# Altium PCB 气象传感器.PcbDoc (part 2 of 2)
Units mm, origin at the board's own origin, x right, y up, seen from the top; angles counter-clockwise.
Board outline 72.46 x 63.14 mm, 2 copper layers (Top Layer, Bottom Layer); 117 components, 86 nets, 422 pads, 155 vias.
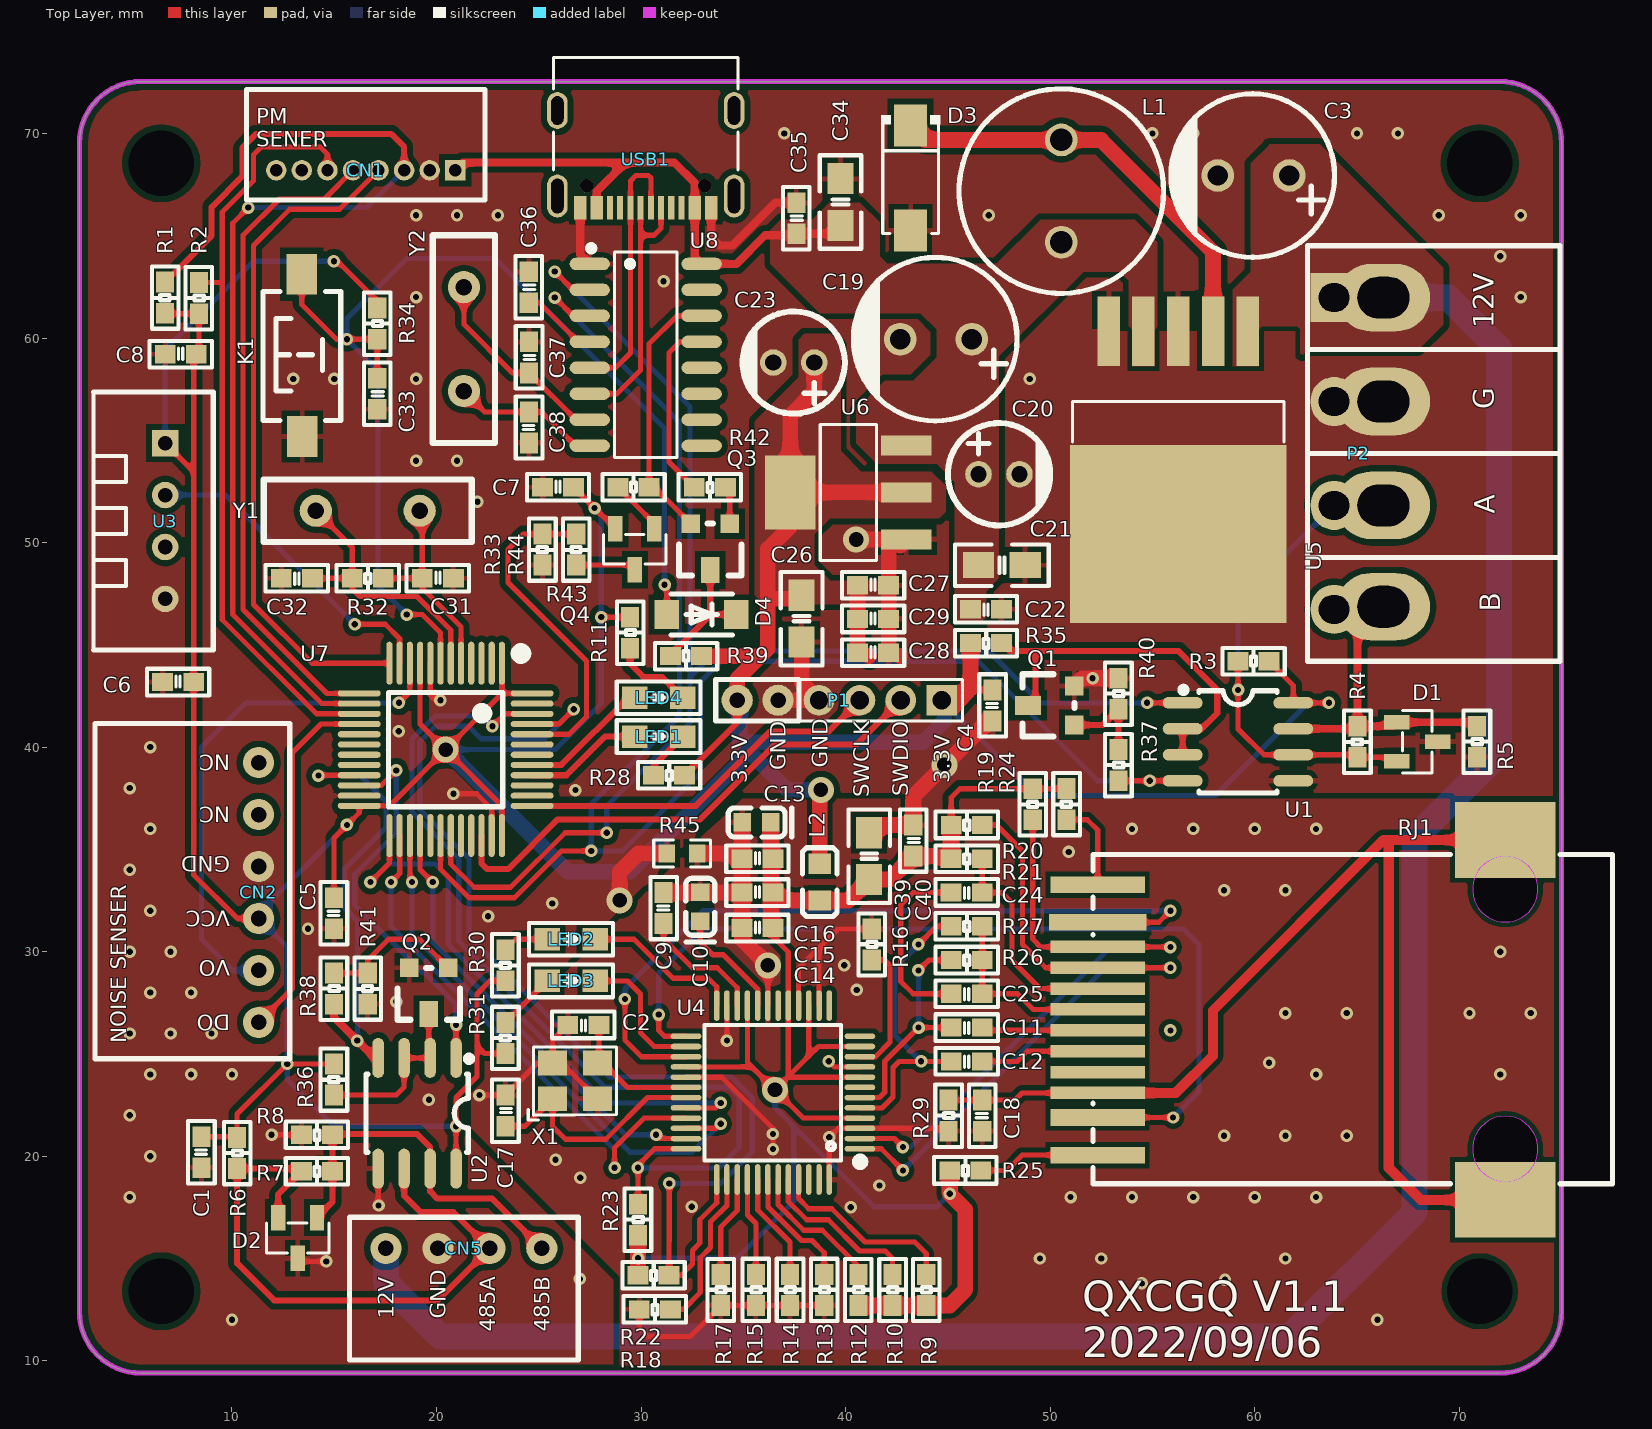
[diagram p0: Top Layer view]

## Polygon pours and split planes (outlines as drawn)
GND on Top Layer "TOP GND" (solid, remove dead copper, pour order 14): 5.54,8.54 cw(c5.54,5.54) 2.54,5.54 2.54,69.54 cw(c5.54,69.54) 5.54,72.54 79.542,72.54 79.54,8.54
AGND on Top Layer "AGND" (solid, pour order 8): 34.948,37.465 32.893,35.56 21.697,24.371 21.697,21.336 21.717,21.336 28.956,14.097 28.956,9.652 73.678,9.652 75.001,12.401 75.001,15.931 75.001,37.465
+3.3V on Top Layer "3.3V" (solid, pour order 4): 37.973,60.198 39.241,60.198 39.751,59.688 39.751,54.483 40.767,53.467 44.196,53.467 44.895,52.768 44.895,51.498 44.577,51.181 39.243,51.181 38.465,50.403 38.465,48.895 38.481,48.895 39.243,48.133 41.783,48.133 41.783,46.992 35.992,46.992 35.56,47.424 35.56,55.943 37.699,58.082 37.699,59.924
+5V on Top Layer "5V" (solid, pour order 2): 38.358,65.786 39.19,66.618 40.697,66.618 41.656,65.659 41.656,64.008 42.033,63.631 47.375,63.631 49.53,65.786 54.142,65.786 55.245,64.683 55.245,58.295 53.848,58.295 53.848,62.801 53.408,63.242 51.636,63.242 47.498,59.104 47.498,48.26 46.863,47.625 46.863,46.359 46.607,46.103 45.464,46.103 45.339,46.228 45.339,52.959 44.45,53.848 41.529,53.848 40.513,54.864 40.513,56.515 41.91,57.912 43.307,57.912 44.45,59.055 44.45,60.419 43.655,61.214 38.739,61.214 36.322,63.631 36.322,65.278 36.83,65.786
+12V on Top Layer "12V" (solid, pour order 1): 68,59.436 69.215,60.651 69.215,63.425 63.171,69.469 60.704,69.469 60.704,69.427 59.817,68.54 59.817,63.246 58.928,62.357 58.928,58.422 59.184,58.166 61.341,58.166 62.611,59.436
GND on Top Layer "7805 GND" (solid, pour order 0): 50.419,45.593 61.976,45.593 61.976,60.325 50.512,60.325
GND on Bottom Layer "BOTTOM GND" (solid, pour order 16): 2.54,9.398 2.54,69.54 cw(c5.54,69.54) 5.54,72.54 75.001,72.54 74.999,9.398
AGND on Bottom Layer "AGND" (solid, pour order 10): 35.836,37.465 21.697,24.359 21.697,21.336 21.717,21.336 28.956,14.097 28.956,9.398 73.152,9.398 75.001,11.247 75.001,37.465

## Keep-outs
Keep-Out Layer:
  lines w0.254: 74.999,69.54 74.999,12.398 cw(c71.999,12.398) 71.999,9.398 5.54,9.398 cw(c5.54,12.398) 2.54,12.398 2.54,69.54 cw(c5.54,69.54) 5.54,72.54 72.001,72.54 cw(c72.001,69.54) 75.001,69.54

## Silkscreen, mask and mechanical layers (free items; w line width, h text height)
Top Overlay:
  text "DHT11" at 44.57,180.022 h0.76
  text "RAIN  / SENSER" at 64.509,143.32 h0.76
  text "PM  / SENER" at 11.176,69.342 h0.76
  text "12V" at 71.683,60.476 h1 r90
  text "G" at 71.681,56.515 h1 r90
  text "A" at 71.729,51.418 h1 r90
  text "B" at 72.009,46.609 h1 r90
  text "QXCGQ V1.1 / 2022/09/06" at 51.562,10.16 h1.5
Bottom Overlay:
  text "12V" at 71.683,63.27 h1 r90
  text "G" at 71.706,57.15 h1 r90
  text "A" at 71.78,52.07 h1 r90
  text "B" at 71.997,47.244 h1 r90

## Text inside footprints (layer, text, board x,y; h text height)
CN2: Top Overlay "DO" at 9.906,26.924 h0.76 r180; Top Overlay "VO" at 9.906,29.591 h0.76 r180; Top Overlay "VCC" at 9.906,32.004 h0.76 r180; Top Overlay "GND" at 9.906,34.671 h0.76 r180; Top Overlay "NC" at 9.906,37.084 h0.76 r180; Top Overlay "NC" at 9.906,39.624 h0.76 r180; Top Overlay "NOISE SENSER" at 4.826,25.527 h0.76 r90
CN5: Top Overlay "485A" at 22.86,11.43 h0.76 r90; Top Overlay "485B" at 25.527,11.43 h0.76 r90; Top Overlay "GND" at 20.447,12.065 h0.76 r90; Top Overlay "12V" at 17.907,12.065 h0.76 r90
P1: Top Overlay "GND" at 39.116,38.989 h0.76 r90; Top Overlay "SWCLK" at 41.154,37.54 h0.76 r90; Top Overlay "SWDIO" at 43.057,37.592 h0.76 r90; Top Overlay "3.3V" at 45.085,38.227 h0.76 r90; Top Overlay "GND" at 37.084,38.862 h0.76 r90; Top Overlay "3.3V" at 35.179,38.227 h0.76 r90